# EAGLE board fasciaMainBoard_V0.1 (EAGLE 9.6.0)
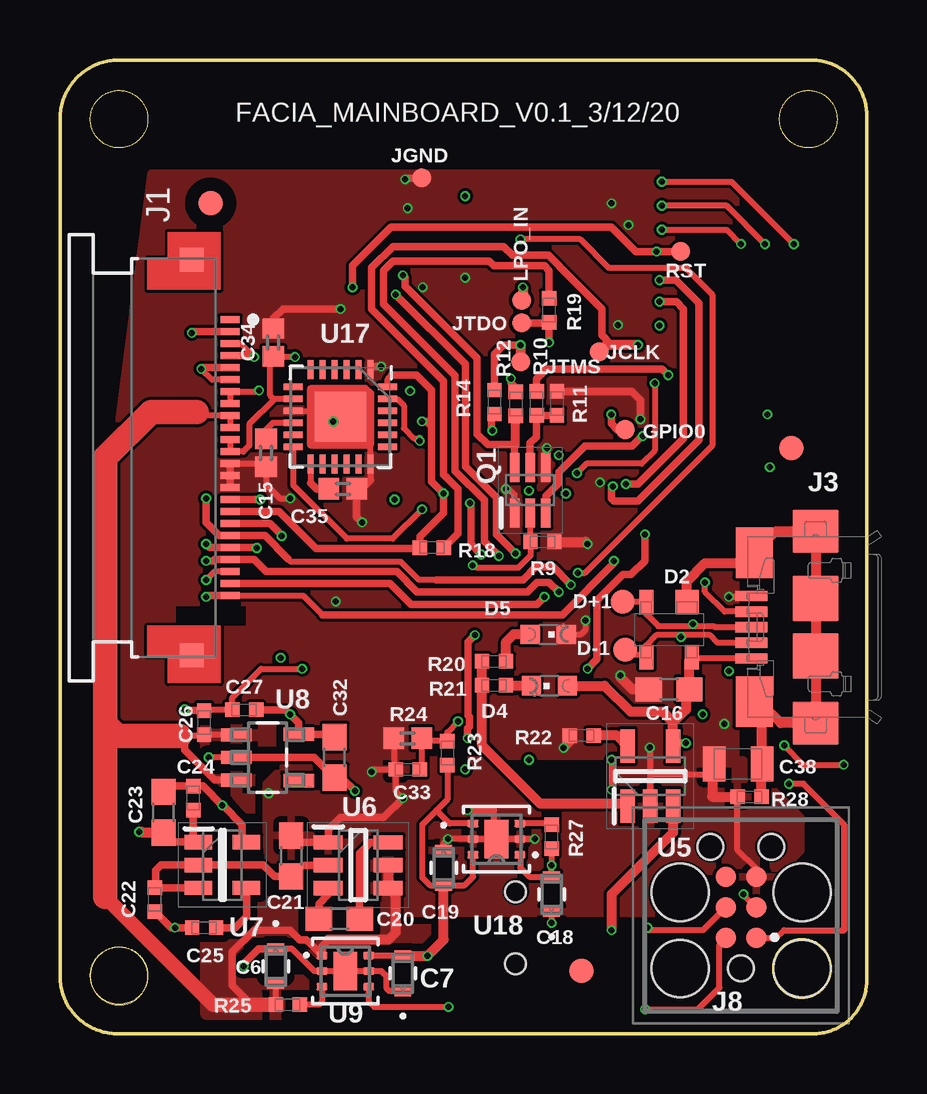
[diagram p0: board, top side]
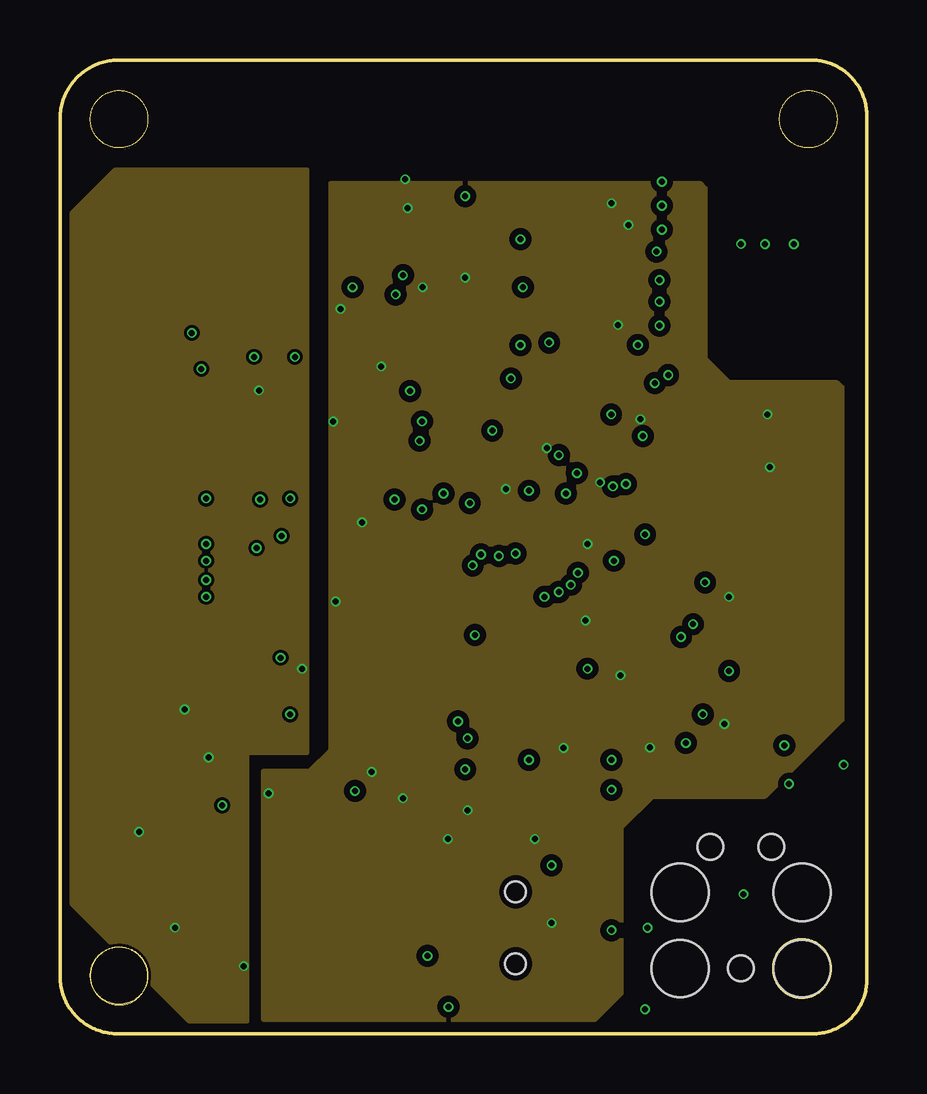
[diagram p1: board, inner layer Route2]
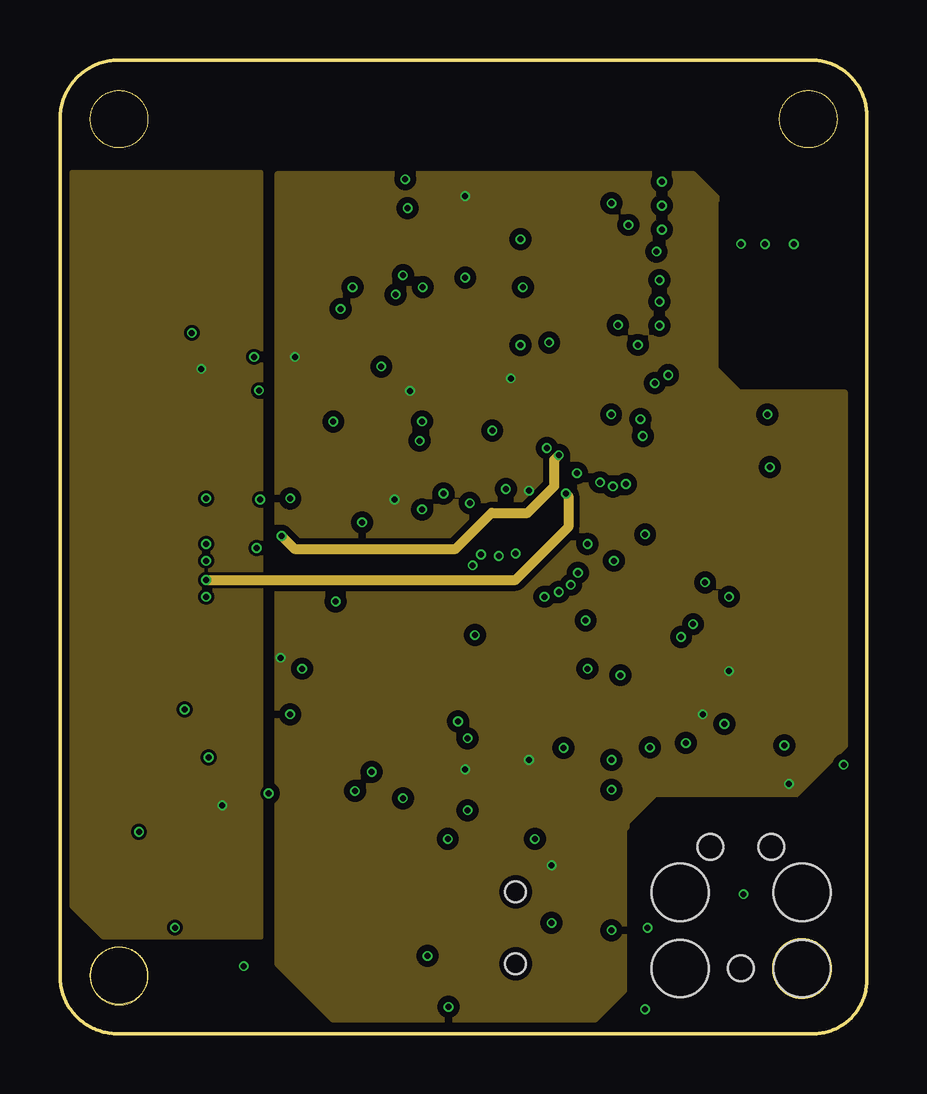
[diagram p2: board, inner layer Route15]
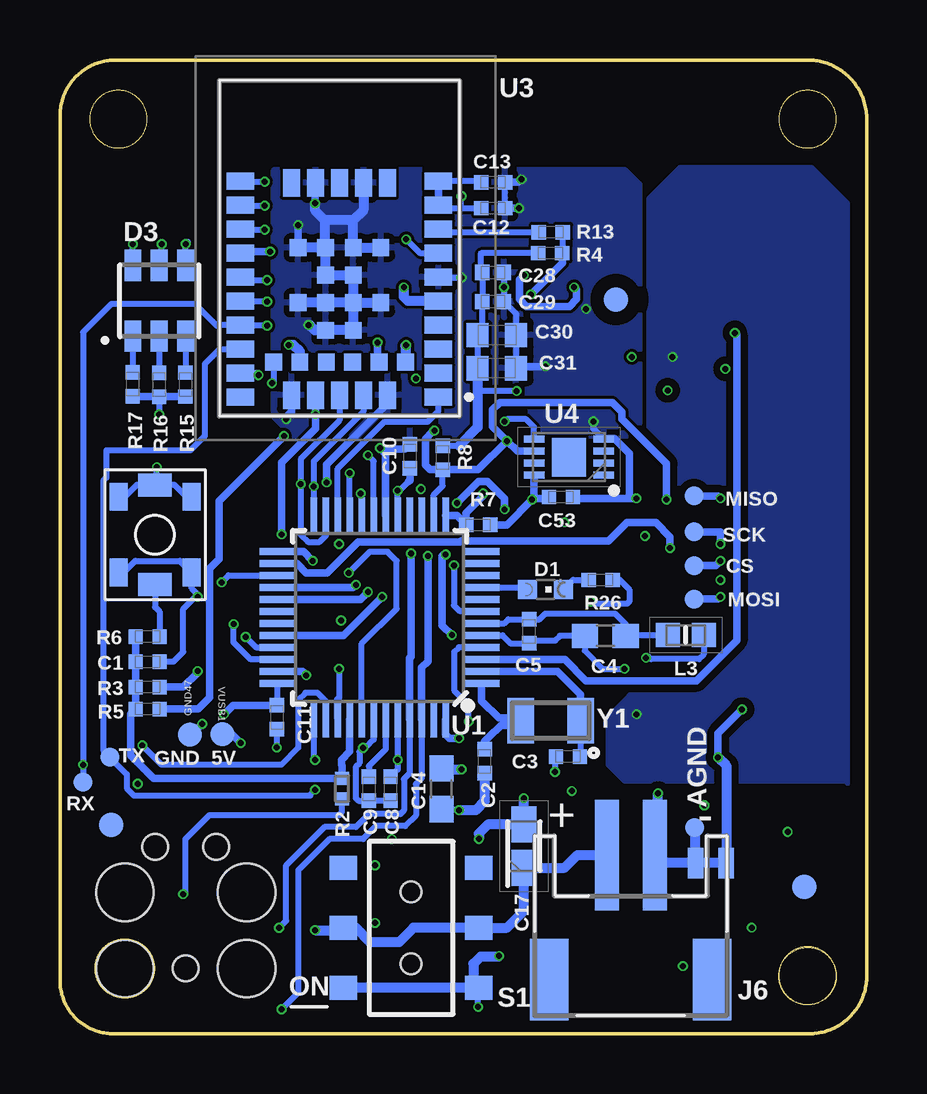
[diagram p3: board, bottom side, seen from below]

Size 33.63 x 40.59 mm. Coordinates in mm from the lower left corner, seen from the top.
Outline: 1093 segments
Copper layers ([15:(1*2)+15*16]): Top 0.035mm / dielectric 0.213359375mm / Route2 0.035mm / dielectric 1.0161mm / Route15 0.035mm / dielectric 0.213359375mm / Bottom 0.035mm
Design rules "SparkFun-4-layer-PCBWAY-LIMIT *": minimum track width 5mil, minimum drill 0.2mm, track to track 5mil, track to pad 5mil, pad to pad 5mil, via to via 5mil, smd to smd 0mil, copper to edge 5mil, drill to drill 5mil, minimum pad ring 3mil, minimum via ring 3mil, stop-mask expansion 4mil, vias tented up to drill 25mil, thermal gap 10mil
Net classes: 0 default: width 0.19 mm, drill 0.19 mm; 1 usb: width 0.19 mm, drill 0.19 mm, clearance 0.127 mm

## Footprints (pad centres in the part's own frame; a part is rotated, then mirrored left to right if it is on the bottom)
0402-TIGHT = smd 0.6 x 0.6: 1 -0.5,0; 2 0.5,0
0603 = smd 1.1 x 1: 1 -0.85,0; 2 0.85,0
CAP_CL10-L = smd 0.452 x 0.698: 1 -0.726,0; 2 0.726,0
0402 = smd 0.85 x 0.9: 1 -0.58,0; 2 0.58,0
CAPPM2014X120N = smd 1.5 x 1.05: 1 -0.9,0; 2 0.9,0
0402-1005X55N = smd 0.62 x 0.62: 1 -0.45,0; 2 0.45,0
0603-1608X90N = smd 0.95 x 1: 1 -0.8,0; 2 0.8,0
0805-R2013X50N = smd 0.95 x 1.45: 1 -1,0; 2 1,0
TP-0.8MM = smd 0.8 x 0.8 bottom: X 0,0
CHIPLED_0603 = smd 0.8 x 0.8: A 0,-0.75; C 0,0.75
SOT190P230X110-4N = smd 1 x 1: 1 -1.15,0.75 | smd 1 x 0.6: 2 -1.15,-0.95; 3 1.15,-0.95; 4 1.15,0.95
PLCC-6 = smd 1.3 x 0.7: A1 1.475,1.1; A2 1.475,0; A3 1.475,-1.1; C1 -1.475,1.1; C2 -1.475,0; C3 -1.475,-1.1
TP-1.00MM = smd 1 x 1 bottom: X 0,0
FD-1-1.5 = smd 1.016 x 1.016: P$1 0,0
MOLEX_52437-2471_0 = smd 0.3 x 0.8: 1 -5.75,0.8; 2 -5.25,0.8; 3 -4.75,0.8; 4 -4.25,0.8; 5 -3.75,0.8; 6 -3.25,0.8; 7 -2.75,0.8; 8 -2.25,0.8; 9 -1.75,0.8; 10 -1.25,0.8; 11 -0.75,0.8; 12 -0.25,0.8; 13 0.25,0.8; 14 0.75,0.8; 15 1.25,0.8; 16 1.75,0.8; 17 2.25,0.8; 18 2.75,0.8; 19 3.25,0.8; 20 3.75,0.8; 21 4.25,0.8; 22 4.75,0.8; 23 5.25,0.8; 24 5.75,0.8 | smd 1 x 1: MP1 -8.25,-0.8; MP2 8.25,-0.8
ZX62-AB-5PA = smd 0.4 x 1.35: 1 -1.3,3.025; 2 -0.65,3.025; 3 0,3.025; 4 0.65,3.025; 5 1.3,3.025 | smd 2.1 x 1.6: 6 3.1,2.9; 11 -3.1,2.9 | smd 1.8 x 1.9: 7 4,0.35; 10 -4,0.35 | smd 1.9 x 1.9: 8 1.2,0.35; 9 -1.2,0.35
JST-PH-2-SMT-RA = smd 1 x 4.6: 1 1,-3.7; 2 -1,-3.7 | smd 1.6 x 3.4: NC1 -3.4,1.5; NC2 3.4,1.5
TC2030MCP = smd 0.864 x 0.864: 1 -0.941,-0.635; 2 -0.941,0.635; 3 0.329,-0.635; 4 0.329,0.635; 5 1.599,-0.635; 6 1.599,0.635 | hole 1.067: -2.211,0; 2.869,1.27; 2.869,-1.27 | hole 2.383: -2.211,2.54; 0.964,2.54; -2.211,-2.54; 0.964,-2.54
BEADC1608X95N = smd 1 x 1: 1 -0.75,0; 2 0.75,0
C&K_PTS820_NO_HOLES = smd 1.15 x 0.75: 1 -1.575,1.525; 2 -1.575,-1.525; 3 1.575,1.525; 4 1.575,-1.525 | smd 0.95 x 1.4: 5 -2.075,0; 6 2.075,0
SOT65P210X110-6N = smd 1.2 x 0.4: 1 -0.95,0.65; 2 -0.95,0; 3 -0.95,-0.65; 4 0.95,-0.65; 5 0.95,0; 6 0.95,0.65
RESC1005X40N = smd 0.54 x 0.6: 1 -0.432,0; 2 0.432,0
SWITCH_DPDT_SMD_AYZ0202 = smd 1 x 1.15: 1 -2.5,2.825; 2 0,2.825; 3 2.5,2.825; 4 -2.5,-2.825; 5 0,-2.825; 6 2.5,-2.825 | hole 0.85: 1.5,0; -1.5,0
2PT_GND_TIE = smd 1.27 x 0.635: P$1 0,0.635; P$2 0,-0.635
TQFP-48 = smd 1.5 x 0.28: 1 -4.25,2.75; 2 -4.25,2.25; 3 -4.25,1.75; 4 -4.25,1.25; 5 -4.25,0.75; 6 -4.25,0.25; 7 -4.25,-0.25; 8 -4.25,-0.75; 9 -4.25,-1.25; 10 -4.25,-1.75; 11 -4.25,-2.25; 12 -4.25,-2.75; 25 4.25,-2.75; 26 4.25,-2.25; 27 4.25,-1.75; 28 4.25,-1.25; 29 4.25,-0.75; 30 4.25,-0.25; 31 4.25,0.25; 32 4.25,0.75; 33 4.25,1.25; 34 4.25,1.75; 35 4.25,2.25; 36 4.25,2.75 | smd 0.28 x 1.5: 13 -2.75,-4.25; 14 -2.25,-4.25; 15 -1.75,-4.25; 16 -1.25,-4.25; 17 -0.75,-4.25; 18 -0.25,-4.25; 19 0.25,-4.25; 20 0.75,-4.25; 21 1.25,-4.25; 22 1.75,-4.25; 23 2.25,-4.25; 24 2.75,-4.25; 37 2.75,4.25; 38 2.25,4.25; 39 1.75,4.25; 40 1.25,4.25; 41 0.75,4.25; 42 0.25,4.25; 43 -0.25,4.25; 44 -0.75,4.25; 45 -1.25,4.25; 46 -1.75,4.25; 47 -2.25,4.25; 48 -2.75,4.25
NINAW102 = smd 0.7 x 1.15: 1 -6.2,-3.875; 2 -5.2,-3.875; 3 -4.2,-3.875; 4 -3.2,-3.875; 5 -2.2,-3.875; 6 -1.2,-3.875; 7 -0.2,-3.875; 8 0.8,-3.875; 9 1.8,-3.875; 10 2.8,-3.875; 16 2.8,4.375; 17 1.8,4.375; 18 0.8,4.375; 19 -0.2,4.375; 20 -1.2,4.375; 21 -2.2,4.375; 22 -3.2,4.375; 23 -4.2,4.375; 24 -5.2,4.375; 25 -6.2,4.375 | smd 1.15 x 0.7: 11 2.725,-1.75; 12 2.725,-0.75; 13 2.725,0.25; 14 2.725,1.25; 15 2.725,2.25; 26 -6.125,2.25; 27 -6.125,1.25; 28 -6.125,0.25; 29 -6.125,-0.75; 30 -6.125,-1.75 | smd 0.7 x 0.7: 31 -4.75,-2.5; 32 -4.75,-1.4; 33 -4.75,-0.3; 34 -4.75,0.8; 35 -4.75,1.9; 36 -4.75,3; 37 -3.42,-0.325; 38 -3.42,0.825; 39 -2.27,-1.475; 40 -2.27,-0.325; 41 -2.27,0.825; 42 -2.27,1.975; 43 -1.12,-0.325; 44 -1.12,0.825; 45 0.03,-1.475; 46 0.03,-0.325; 47 0.03,0.825; 48 0.03,1.975
SON50P300X200X60-9N = smd 0.85 x 0.3: 1 -1.45,0.75; 2 -1.45,0.25; 3 -1.45,-0.25; 4 -1.45,-0.75; 5 1.45,-0.75; 6 1.45,-0.25; 7 1.45,0.25; 8 1.45,0.75 | smd 1.4 x 1.6: 9 0,0
SOT95P270X145-5N = smd 1.4 x 0.6: 1 -1.25,0.95; 2 -1.25,0; 3 -1.25,-0.95; 4 1.25,-0.95; 5 1.25,0.95
SOT95P280X145-6N = smd 1.2 x 0.6: 1 -1.25,0.95; 2 -1.25,0; 3 -1.25,-0.95; 4 1.25,-0.95; 5 1.25,0; 6 1.25,0.95
SOT96P230X110-5N = smd 1.15 x 0.6: 1 -1,0.955; 2 -1,0; 3 -1,-0.955; 4 1,-0.955; 5 1,0.955
SOT95P280X110-5N = smd 1.27 x 0.559: 1 -1.295,0.94; 2 -1.295,0; 3 -1.295,-0.94; 4 1.295,-0.965; 5 1.295,0.965
DRV0006A = smd 0.457 x 0.305: 1 -0.975,0.65; 2 -0.975,0; 3 -0.975,-0.65; 4 0.975,-0.65; 5 0.975,0; 6 0.975,0.65 | smd 0.991 x 1.6: 7 0,0
QFN50P400X400X95-25T265X275N = smd 0.26 x 0.79: 1 -1.25,-1.97; 2 -0.75,-1.97; 3 -0.25,-1.97; 4 0.25,-1.97; 5 0.75,-1.97; 6 1.25,-1.97; 13 1.25,1.97; 14 0.75,1.97; 15 0.25,1.97; 16 -0.25,1.97; 17 -0.75,1.97; 18 -1.25,1.97 | smd 0.79 x 0.26: 7 1.97,-1.25; 8 1.97,-0.75; 9 1.97,-0.25; 10 1.97,0.25; 11 1.97,0.75; 12 1.97,1.25; 19 -1.97,1.25; 20 -1.97,0.75; 21 -1.97,0.25; 22 -1.97,-0.25; 23 -1.97,-0.75; 24 -1.97,-1.25 | smd 2.15 x 2.05: 25 0,0
ECX-31B = smd 1.1 x 1.9: 1 -1.25,0; 2 1.25,0

## Placement (x,y rotation side)
C1  0.1uF  [0402-TIGHT]  29.98,15.51 0 bottom
C2  20pF  [0402-TIGHT]  15.93,11.35 90 bottom
C3  20pF  [0402-TIGHT]  12.46,11.55 0 bottom
C4  10uF  [0603]  10.9,16.58 0 bottom
C5  0.1uF  [0402-TIGHT]  14.07,16.77 90 bottom
C6  10uF  [CAP_CL10-L]  9,2.81 270 top
C7  10uF  [CAP_CL10-L]  14.29,2.52 90 top
C8  0.1uF  [0402-TIGHT]  19.85,10.21 90 bottom
C9  1uF  [0402-TIGHT]  20.75,10.21 90 bottom
C10  0.1uF  [0402-TIGHT]  19.04,24.08 270 bottom
C11  0.1uF  [0402-TIGHT]  24.58,13.19 90 bottom
C12  0.1uF  [0402-TIGHT]  15.57,34.41 0 bottom
C13  0.1uF  [0402-TIGHT]  15.57,35.49 180 bottom
C14  10uF  [0603]  17.73,10.21 90 bottom
C15  0.1uF  [0402]  8.6,24.21 270 top
C16  10uF  [0603]  25.39,14.35 0 top
C17  TAJR475K010RNJ  [CAPPM2014X120N]  14.29,7.82 90 bottom
C18  10uF  [CAP_CL10-L]  20.5,5.81 90 top
C19  10uF  [CAP_CL10-L]  16,6.91 270 top
C20  10uF  [0603]  11.65,4.79 180 top
C21  10uF  [0603]  9.64,7.41 270 top
C22  2.2uF  [0402-TIGHT]  3.95,5.59 90 top
C23  10uF  [0603]  4.32,9.23 90 top
C24  2.2uF  [0402-TIGHT]  5.56,9.82 90 top
C25  0.01uF  [0402-TIGHT]  6.01,4.42 0 top
C26  2.2uF  [0402-TIGHT]  6.01,12.97 270 top
C27  2.2uF  [0402-TIGHT]  7.68,13.5 0 top
C28  DNP  [0402-1005X55N]  15.57,31.73 180 bottom
C29  DNP  [0402-1005X55N]  15.57,30.52 0 bottom
C30  DNP  [0603-1608X90N]  15.42,29.12 180 bottom
C31  DNP  [0603-1608X90N]  15.42,27.74 0 bottom
C32  10uF  [0603]  11.45,11.52 90 top
C33  0.1uF  [0402-TIGHT]  14.5,11.02 0 top
C34  10NF0402-5%  [0402]  8.89,28.81 90 top
C35  0.1uF  [0402]  11.79,22.71 0 top
C38  4n7  [0805-R2013X50N]  28.27,11.25 180 top
C53  0.1uF  [0402-TIGHT]  12.75,22.37 0 bottom
CS  DNP  [TP-0.8MM]  7.2,19.52 0 top
D1  [CHIPLED_0603]  13.39,18.52 270 bottom
D2  PRTR5V  [SOT190P230X110-4N]  25.39,16.84 270 top
D3  LTRBGFSF-ABCB-QKYO-0-0-R18-Z  [PLCC-6]  29.49,30.55 90 bottom
D4  [CHIPLED_0603]  20.41,14.5 90 top
D5  [CHIPLED_0603]  20.36,16.65 270 top
D+1  DNP  [TP-1.00MM]  23.46,18.01 270 bottom
D-1  DNP  [TP-1.00MM]  23.56,16.01 270 bottom
FD1  DNP  [FD-1-1.5]  6.27,34.62 180 top
FD2  DNP  [FD-1-1.5]  21.74,2.63 180 top
FD3  DNP  [FD-1-1.5]  10.46,30.61 180 bottom
FD4  DNP  [FD-1-1.5]  30.5,24.41 0 top
FD5  DNP  [FD-1-1.5]  31.5,8.71 0 bottom
FD6  DNP  [FD-1-1.5]  2.59,6.11 0 bottom
GND47  DNP  [TP-1.00MM]  28.21,12.47 270 top
GPIO0  DNP  [TP-0.8MM]  23.57,25.19 90 bottom
J1  MOLEX_52437-2471MOLEX_52437-2471_0_0  [MOLEX_52437-2471_0]  6.29,24.02 270 top
J3  -  [ZX62-AB-5PA]  31.85,16.95 90 top
J6  [JST-PH-2-SMT-RA]  9.84,3.75 180 bottom
J8  TC2030-MCP  [TC2030MCP]  28.39,4.93 90 top
JCLK  DNP  [TP-0.8MM]  22.48,28.43 270 bottom
JGND  DNP  [TP-0.8MM]  15.09,35.67 270 bottom
JTDO  DNP  [TP-0.8MM]  19.24,29.63 270 bottom
JTMS  DNP  [TP-0.8MM]  19.21,28.01 270 bottom
L3  BLM18PG471SN1D  [BEADC1608X95N]  7.55,16.62 180 bottom
LPO_IN  DNP  [TP-0.8MM]  19.24,30.57 270 bottom
MISO  DNP  [TP-0.8MM]  7.2,22.41 0 top
MOSI  DNP  [TP-0.8MM]  7.2,18.12 0 top
PB1  PTS820  [C&K_PTS820_NO_HOLES]  29.67,20.8 270 bottom
PGND  DNP  [TP-0.8MM]  7.17,8.59 180 top
Q1  BSS138PS,115  [SOT65P210X110-6N]  19.6,22.66 90 top
R2  39R  [RESC1005X40N]  21.87,10.22 270 bottom
R3  10K  [0402-TIGHT]  29.98,14.45 0 bottom
R4  1k  [0402-TIGHT]  13.19,32.54 180 bottom
R5  330  [0402-TIGHT]  29.98,13.53 0 bottom
R6  330  [0402-TIGHT]  29.98,16.56 180 bottom
R7  4.7K  [0402-TIGHT]  16.19,21.21 0 bottom
R8  4.7K  [0402-TIGHT]  17.68,24.02 90 bottom
R9  150K  [0402-TIGHT]  20.11,20.5 180 top
R10  0  [0402-TIGHT]  19.87,26.28 270 top
R11  150K  [0402-TIGHT]  20.72,26.28 270 top
R12  10K  [0402-TIGHT]  19,26.25 270 top
R13  0  [0402-TIGHT]  13.17,33.41 180 bottom
R14  0  [0402-TIGHT]  18.11,26.33 270 top
R15  330  [0402-TIGHT]  28.4,27.06 270 bottom
R16  330  [0402-TIGHT]  29.5,27.05 270 bottom
R17  330  [0402-TIGHT]  30.6,27.07 270 bottom
R18  0  [0402-TIGHT]  15.5,20.26 180 top
R19  0  [0402-TIGHT]  20.39,30.16 270 top
R20  470  [0402-TIGHT]  18.09,15.53 180 top
R21  470  [0402-TIGHT]  18.09,14.52 180 top
R22  2K  [0402-TIGHT]  21.74,12.43 180 top
R23  374K  [0402-TIGHT]  16.15,11.7 270 top
R24  1.2M  [0402]  14.5,12.32 0 top
R25  10K  [0402-TIGHT]  9.5,1.21 0 top
R26  470  [0402-TIGHT]  11.1,18.91 180 bottom
R27  10K  [0402-TIGHT]  20.5,8.21 90 top
R28  1M  [0402-TIGHT]  28.75,9.88 0 top
RST  DNP  [TP-0.8MM]  25.87,32.61 180 bottom
RX  DNP  [TP-0.8MM]  31.56,11.52 180 top
S1  [SWITCH_DPDT_SMD_AYZ0202]  19,4.41 270 bottom
SCK  DNP  [TP-0.8MM]  7.2,20.91 0 top
SUPPLY1  2PT_GND_TIE  [2PT_GND_TIE]  6.5,7.11 270 bottom
TX  DNP  [TP-0.8MM]  32.67,10.49 180 top
U1  ATSAMD21G-A  [TQFP-48]  20.3,17.35 180 bottom
U3  NINA-W102  [NINAW102]  21.73,32.74 90 bottom
U4  ATECC508A-MAHDA-T  [SON50P300X200X60-9N]  12.41,24.04 180 bottom
U5  MCP73831T-4ADI_OT  [SOT95P270X145-5N]  24.61,10.73 90 top
U6  LM2664M6_NOPB  [SOT95P280X145-6N]  12.43,7.03 0 top
U7  TPS72325QDBVRQ1  [SOT96P230X110-5N]  6.77,7.03 0 top
U8  TLV70025DDCR  [SOT95P280X110-5N]  8.65,11.52 0 top
U9  LP5912Q3.3DRVRQ1  [DRV0006A]  11.89,2.61 0 top
U17  MPU6050  [QFN50P400X400X95-25T265X275N]  11.69,25.71 180 top
U18  LP5912Q3.3DRVRQ1  [DRV0006A]  18.19,8.11 180 top
VUSB1  DNP  [TP-1.00MM]  26.86,12.48 270 top
Y1  32.768Khz  [ECX-31B]  13.18,13.05 180 bottom

## Library data of the parts
C1-C3 C5 C8-C13 C22 C24-C27 C33 C53 = novaXR; PROD_ID: CAP-12416
C4 C14 C16 C20 C21 C23 C32 = SparkFun-Capacitors; PROD_ID: CAP-11015
C6 C7 C18 C19 = Lp5912Q3.3DRV; MANUFACTURER_PART_NUMBER: CL10B106MQ8NRNC; VENDOR: Samsung
C15 C35 = SparkFun-Capacitors; PROD_ID: CAP-12416
C17 = SamacSys_Parts; ALLIED_NUMBER: 70475142; ALLIED_PRICE-STOCK: https://www.alliedelec.com/avx-tajr475k010rnj/70475142/; DESCRIPTION: AVX 4.7uF SMD Solid MnO2 Tantalum Electrolytic Capacitor, 10 V dc +/-10%, TAJ Series; HEIGHT: 1.2mm; MANUFACTURER_NAME: AVX; MANUFACTURER_PART_NUMBER: TAJR475K010RNJ; MOUSER_PART_NUMBER: 581-TAJR475K010R; MOUSER_PRICE-STOCK: https://www.mouser.com/Search/Refine.aspx?Keyword=581-TAJR475K010R; RS_PART_NUMBER: 1355409P; RS_PRICE-STOCK: http://uk.rs-online.com/web/p/products/1355409P
C28-C31 = Arduino-rcl; CODE-ARDUINO: DNP; DATASHEET: DNP; DISTRIBUTOR-LINK: DNP; DISTRIBUTOR-PN: DNP; MANUFACTURER: DNP; MANUFACTURER-PN: DNP
C34 = SparkFun-Capacitors
C38 = Arduino-rcl; CODE-ARDUINO: 0689; DATASHEET: http://www.kemet.com/Lists/ProductCatalog/Attachments/40/KEM_C1010_X7R_HV_SMD.pdf; DISTRIBUTOR-LINK: www.kemet.com/docfinder?Partnumber=C0805C472KDRACTU; DISTRIBUTOR-PN: 399-6738-1-ND; MANUFACTURER: Kemet; MANUFACTURER-PN: C0805C472KDRACTU; VOLTAGE: 1KV
CS D+1 D-1 FD1-FD6 GND47 GPIO0 JCLK JGND JTDO JTMS LPO_IN MISO MOSI PGND RST RX SCK TX VUSB1 = Arduino-utility; CODE-ARDUINO: DNP; DATASHEET: DNP; DISTRIBUTOR-LINK: DNP; DISTRIBUTOR-PN: DNP; MANUFACTURER: DNP; MANUFACTURER-PN: DNP
D1 D4 D5 J6 = adafruit
D2 = Arduino-diodes; CODE-ARDUINO: 2209; DATASHEET: http://www.nxp.com/documents/data_sheet/PRTR5V0U2X.pdf; DISTRIBUTOR-LINK: http://www.digikey.com/product-detail/en/nxp-semiconductors/PRTR5V0U2X,215/568-4140-1-ND/1589981; DISTRIBUTOR-PN: 568-4140-1-ND; MANUFACTURER: NXP; MANUFACTURER-PN: PRTR5V0U2X,215
D3 = SamacSys_Parts; DESCRIPTION: LED RGB DIFFUSED 6SMD; HEIGHT: mm; MANUFACTURER_NAME: OSRAM Opto Semiconductors; MANUFACTURER_PART_NUMBER: LTRBGFSF-ABCB-QKYO-0-0-R18-Z; MOUSER_PART_NUMBER: N/A; MOUSER_PRICE-STOCK: https://www.mouser.com/Search/Refine.aspx?Keyword=N%2FA
J1 = Molex - 52437-2471; CIIVA_IDS: 605212; CIRCUITS_LOADED: 24; COMPONENT_LINK_1_DESCRIPTION: Manufacturer URL; COMPONENT_LINK_1_URL: http://www.molex.com/molex/index.jsp; COMPONENT_LINK_3_DESCRIPTION: Package Specification; COMPONENT_LINK_3_URL: http://www.molex.com/pdm_docs/sd/524372471_sd.pdf; CONTACT_POSITION: Bottom; CURRENT_MAX_PER_CONTACT: 0.5A; DATASHEET: http://www.molex.com/webdocs/datasheets/pdf/en-us/0524372471_FFC_FPC_CONNECTORS.pdf; DURABILITY_MATING_CYCLES_MAX: 20; ENTRY_ANGLE: 90degrees Angle; FOOTPRINT_VARIANT_NAME_0: Manufacturer Recommended; IMPORTED: yes; IMPORTED_FROM: vault; IMPORT_TS: 1521869192; MATERIAL___METAL: Phosphor Bronze; MATERIAL___PLATING_MATING: Gold; MATERIAL___PLATING_TERMINATION: Gold; MF: Molex; MOUNTING_TECHNOLOGY: Surface Mount; MPN: 52437-2471; NUMBER_OF_ROWS: 1; ORIENTATION: Right Angle; PACKAGE: 52437-2471; PACKAGE_DESCRIPTION: 24-Lead FPC Connector, Pitch 0.5 mm; PACKAGE_VERSION: Rev. E, 07/2013; PACKING: Tape and Reel; PCB_LOCATOR: No; PCB_RETENTION: None; PITCH___MATING_INTERFACE: 0.50mm; POLARIZED_TO_PCB: Yes; PREFIX: J; RELEASE_DATE: 1411372502; ROHS: Yes; STACKABLE: No; VAULT_GUID: C435F480-C5D6-47A9-8B3E-1F527B5FE02A; VAULT_REVISION: D1E34D73-9D44-46B4-956C-D39459EFC8BE; VOLTAGE_MAX: 50V
J3 = Arduino-connectors; CODE-ARDUINO: 2219; DATASHEET: https://www.hirose.com/product/en/download_file/key_name/ZX/category/Catalog/doc_file_id/31704/?file_category_id=4&item_id=13&is_series=1; DISTRIBUTOR-LINK: http://www.digikey.com/product-detail/en/hirose-electric-co-ltd/ZX62-AB-5PA(31)/H125279CT-ND/5994741; DISTRIBUTOR-PN: H125279CT-ND; MANUFACTURER: Hirose; MANUFACTURER-PN: ZX62-AB-5PA(31)
J8 = TC2030-MCP; ALLIED_NUMBER: 70547380; ALLIED_PRICE-STOCK: https://www.alliedelec.com/microchip-technology-inc-tc2030-mcp/70547380/; DESCRIPTION: TC2030-MCP PCB FOOTPRINT,TC2030-MCP; HEIGHT: 3mm; MANUFACTURER_NAME: Microchip; MANUFACTURER_PART_NUMBER: TC2030-MCP; MOUSER_PART_NUMBER: 579-TC2030-MCP; MOUSER_PRICE-STOCK: https://www.mouser.com/Search/Refine.aspx?Keyword=579-TC2030-MCP; RS_PART_NUMBER: 8252568; RS_PRICE-STOCK: http://uk.rs-online.com/web/p/products/8252568
L3 = SamacSys_Parts; DESCRIPTION: Chip Ferrite Bead; HEIGHT: 0.95mm; MANUFACTURER_NAME: Murata Electronics; MANUFACTURER_PART_NUMBER: BLM18PG471SN1D; MOUSER_PART_NUMBER: 81-BLM18PG471SN1D; MOUSER_PRICE-STOCK: https://www.mouser.com/Search/Refine.aspx?Keyword=81-BLM18PG471SN1D; RS_PART_NUMBER: 7241425P; RS_PRICE-STOCK: http://uk.rs-online.com/web/p/products/7241425P
PB1 = Arduino-pushbuttons; CODE-ARDUINO: 0277; DATASHEET: http://www.ckswitches.com/media/1474/pts820.pdf; DISTRIBUTOR-LINK: https://www.digikey.com/product-detail/en/c-k/PTS820-J15M-SMTR-LFS/CKN10506CT-ND/4176681; DISTRIBUTOR-PN: PTS820 J25K SMTR LFS-ND; MANUFACTURER: C&K; MANUFACTURER-PN: PTS820 J25K SMTR LFS
Q1 = SamacSys_Parts; DESCRIPTION: Nexperia BSS138PS,115 Dual N-channel MOSFET, 320 mA, 60 V, 6-Pin SOT-363; HEIGHT: 1.1mm; MANUFACTURER_NAME: Nexperia; MANUFACTURER_PART_NUMBER: BSS138PS,115; MOUSER_PART_NUMBER: 771-BSS138PS115; MOUSER_PRICE-STOCK: https://www.mouser.com/Search/Refine.aspx?Keyword=771-BSS138PS115; RS_PART_NUMBER: 7920901P; RS_PRICE-STOCK: http://uk.rs-online.com/web/p/products/7920901P
R2 = RC0402FR-0739RL; AVAILABILITY: Unavailable; DESCRIPTION: Surface Mount Thick Film Resistor, RC Series, 39 ohm, 63 mW, - 1%, 50 V, 0402 [1005 Metric]; MF: Yageo; MP: RC0402FR-0739RL; PACKAGE: 1005 Panasonic Electronic Components; PRICE: None
R3-R28 = novaXR
S1 = SparkFun-Switches; PROD_ID: SWCH-08179; SF_SKU: COM-00597
SUPPLY1 = SparkFun-PowerSymbols
U1 = SparkFun-IC-Microcontroller; PROD_ID: IC-13064
U3 = SamacSys_Parts; DESCRIPTION: STAND-ALONE MULTIRADIO MODULE; HEIGHT: 3mm; MANUFACTURER_NAME: U-Blox; MANUFACTURER_PART_NUMBER: NINA-W102
U4 = SamacSys_Parts; DESCRIPTION: Microchip ATECC508A-MAHDA-T 10kb 8-Pin Crypto Authentication IC UDFN; HEIGHT: 0.6mm; MANUFACTURER_NAME: Microchip; MANUFACTURER_PART_NUMBER: ATECC508A-MAHDA-T; MOUSER_PART_NUMBER: 556-ATECC508A-MAHDAT; MOUSER_PRICE-STOCK: https://www.mouser.com/Search/Refine.aspx?Keyword=556-ATECC508A-MAHDAT; RS_PART_NUMBER: 1773144P; RS_PRICE-STOCK: http://uk.rs-online.com/web/p/products/1773144P
U5 = SamacSys_Parts; ALLIED_NUMBER: 70567395; ALLIED_PRICE-STOCK: https://www.alliedelec.com/microchiptechnologyinc-mcp73831t-4adi-ot/70567395/; DESCRIPTION: Battery Management Li-Ion/Li-Poly Charg Mgnt 4.4V Vreg out; HEIGHT: 1.45mm; MANUFACTURER_NAME: Microchip; MANUFACTURER_PART_NUMBER: MCP73831T-4ADI/OT; MOUSER_PART_NUMBER: 579-MCP73831T4ADIOT; MOUSER_PRICE-STOCK: https://www.mouser.com/Search/Refine.aspx?Keyword=579-MCP73831T4ADIOT
U6 = SamacSys_Parts; DESCRIPTION: 1.8V to 5.5Vin Switched Capacitor Voltage Converter; HEIGHT: 1.45mm; MANUFACTURER_NAME: Texas Instruments; MANUFACTURER_PART_NUMBER: LM2664M6/NOPB; MOUSER_PART_NUMBER: 926-LM2664M6/NOPB; MOUSER_PRICE-STOCK: https://www.mouser.com/Search/Refine.aspx?Keyword=926-LM2664M6%2FNOPB; RS_PART_NUMBER: 5358792P; RS_PRICE-STOCK: http://uk.rs-online.com/web/p/products/5358792P
U7 = SamacSys_Parts; DESCRIPTION: Automotive Single Output LDO, 200mA, High PSRR, Low Noise; HEIGHT: 1.1mm; MANUFACTURER_NAME: Texas Instruments; MANUFACTURER_PART_NUMBER: TPS72325QDBVRQ1
U8 = SamacSys_Parts; DESCRIPTION: 200-mA, Low-IQ, Low-Dropout Regulator for Portable Devices; HEIGHT: mm; MANUFACTURER_NAME: Texas Instruments; MANUFACTURER_PART_NUMBER: TLV70025DDCR; MOUSER_PART_NUMBER: 595-TLV70025DDCR; MOUSER_PRICE-STOCK: https://www.mouser.com/Search/Refine.aspx?Keyword=595-TLV70025DDCR
U9 U18 = Lp5912Q3.3DRV
U17 = invensense
Y1 = SamacSys_Parts; DESCRIPTION: Crystals 32.768KHz 20ppm 12.5pF -40C +85C; HEIGHT: mm; MANUFACTURER_NAME: ECS; MANUFACTURER_PART_NUMBER: ECS-.327-12.5-34B-TR; MOUSER_PART_NUMBER: 520-327-12.5-34B; MOUSER_PRICE-STOCK: https://www.mouser.com/Search/Refine.aspx?Keyword=520-327-12.5-34B

## Nets
+5V: C16.2 D2.4 D4.A J3.1 U5.4 VUSB1.X
-RAW: C21.2 C22.2 U6.2 U7.2 U7.3
_V_BATT: C17.1 J6.1 S1.2 S1.5 U5.3
ADS_RESET: J1.23 U1.32
AGND: C4.1 C5.1 C6.1 C7.1 C22.1 C23.1 C24.1 C25.1 C26.1 C27.1 C32.1 J1.7 J1.8 SUPPLY1.P$1 U1.5 U7.1 U8.2 U9.2 U9.5 U9.7
AVDD: C27.2 C32.2 J1.3 J1.4 U8.5
AVSS: C23.2 C24.2 J1.5 J1.6 U7.5
BLUE: D3.A3 U3.18
DVDD: C6.2 C26.2 J1.9 J1.10 R25.1 U6.4 U6.5 U8.1 U8.3 U9.1
DVDD_ISO: U1.11
GND: C1.2 C2.1 C3.1 C8.1 C9.1 C10.1 C11.1 C12.2 C13.1 C14.1 C15.2 C16.1 C17.2 C18.1 C19.1 C21.1 C28.1 C29.2 C30.1 C31.2 C33.1 C34.2 C35.2 C38.2 C53.2 D5.C GND47.X J1.13 J1.14 J1.15 J3.5 J6.2 J8.5 JGND.X PB1.1 PB1.2 PB1.3 PB1.4 PB1.5 PGND.X Q1.1 Q1.4 R9.1 R11.1 R15.2 R16.2 R17.2 R22.2 R24.1 R26.1 R28.1 SUPPLY1.P$2 U1.18 U1.35 U1.42 U3.6 U3.12 U3.14 U3.26 U3.30 U3.37 U3.38 U3.39 U3.40 U3.41 U3.42 U3.43 U3.44 U3.45 U3.46 U3.47 U3.48 U4.4 U5.2 U6.1 U17.1 U17.9 U17.18 U17.25 U18.2 U18.5 U18.7
GND_ISO: U1.8
GREEN: D3.A1 U3.16
MPU_INT: U1.48 U17.12
N$1: J8.3 R2.2
N$2: R27.2 U18.3
N$3: PB1.6 R6.1
N$4: C2.2 U1.1 Y1.2
N$5: C15.1 U17.10
N$6: C3.2 U1.2 Y1.1
N$7: R25.2 U9.3
N$8: Q1.5 R10.2 R11.2
N$9: R10.1 U3.24
N$10: C9.2 U1.43
N$11: R13.2 U3.8
N$12: Q1.6 R12.2 RST.X U3.19
N$13: D1.C R26.2
N$14: C35.1 U17.13
N$15: D1.A U1.9
N$16: D3.C1 R17.1
N$17: D3.C2 R16.1
N$18: D3.C3 R15.1
N$19: JTMS.X R14.1 U3.31
N$20: JTDO.X R19.2 U3.32
N$21: JCLK.X R18.1 U3.35
N$23: LPO_IN.X U3.5
N$25: D4.C R21.1
N$28: R20.2 R21.2 U5.1
N$30: R22.1 U5.5
N$31: C20.2 U6.3
N$32: C20.1 U6.6
N$33: C25.2 U7.4
N$40: C38.1 D2.1 J3.6 J3.7 J3.8 J3.9 J3.10 J3.11 R28.2
N$42: D5.A R20.1
PA02_EDA_SIG: J1.2 U1.3
PA10_D2: U1.15
PA12_S2_TX_MOSI: U1.21 U3.36
PA13_S2_RX_MISO: U1.22 U3.1
PA14_S2_RTS_CS: U1.23 U3.21 U3.28
PA15_S2_CTS_SCK: U1.24 U3.20 U3.29
PA16_S1_MOSI: J1.24 MOSI.X U1.25
PA17_S1_SCK: J1.20 SCK.X U1.26
PA18_OTG: J3.4 U1.27
PA19_S1_MISO: J1.19 MISO.X U1.28
PA20_CS: CS.X J1.21 U1.29
PA21_CS1: U1.30
PA27_GPIO0: GPIO0.X U1.39 U3.27
PA28_ACK: U1.41 U3.7
PA30_SWCLK: J8.4 R4.1 R13.1 U1.45
PA31_SWDIO: J8.2 R19.1 U1.46
PB08_RST: Q1.2 R9.2 U1.7
PB10_DRDY: J1.18 U1.19
PB11_CLKSEL: J1.22 U1.20
PB22_S5_TX: RX.X U1.37 U3.23
PB23_S5_RX: TX.X U1.38 U3.22
RED: D3.A2 U3.17
RESET#: Q1.3 R5.2
RESETN: C1.1 R2.1 R3.1 R5.1 R6.2 U1.40
S0_I2C_SCL: J1.16 R8.1 R14.2 U1.14 U4.6 U17.23
S0_I2C_SDA: J1.17 R7.1 R18.2 U1.13 U4.5 U17.24
USBN: D2.3 D-1.X J3.2 U1.33
USBP: D2.2 D+1.X J3.3 U1.34
V_BATT: C7.2 C19.2 R23.2 S1.3 S1.6 U9.4 U9.6 U18.4 U18.6
VBAT_LVL: C33.2 R23.1 R24.2 U1.4
VCC: C8.2 C10.2 C11.2 C12.1 C13.2 C14.2 C18.2 C28.2 C29.1 C30.2 C31.1 C34.1 C53.1 J1.11 J1.12 J8.1 L3.1 R3.2 R4.2 R7.2 R8.2 R12.1 R27.1 U1.17 U1.36 U1.44 U3.9 U3.10 U4.8 U17.8 U18.1
VDDANA: C4.2 C5.2 L3.2 U1.6

## Tracks (layer width: path | path; a pad name or v marks a point on that pad's centre or on a via)
+5V  (via drill 0.25)
  Top 0.254: J3.1 26.29,15.65 26.24,15.59
  Top 0.305: U5.4 25.69,12.11 v26.1,12.11
  Top 0.406: D4.A 22.71,14.5 23.79,13.41 25.13,13.41 25.56,12.98 | D2.4 26.24,15.59 C16.2 26.1,14.21 26.1,13.52 25.56,12.98 | U5.4 25.56,12.98
  Bottom 0.305: v26.1,12.11 26.46,12.48 VUSB1.X
-RAW
  Top 0.305: 3.97,6.08 C22.2 4,6.13 | 4,6.13 4,6.81 4.21,7.03 U7.2 8.48,7.03 8.95,6.56 C21.2 10.11,7.03 U6.2 | U7.3 4.05,6.08 4,6.13
_V_BATT  (via drill 0.25)
  Top 0.406: U5.3 25.56,8.38 23,5.81 v23,4.31
  Bottom 0.406: J6.1 12.06,7.45 12.59,6.92 C17.1 14.29,5.12 15,4.41 S1.2 18.89,4.41 19.5,3.81 20.69,3.81 21.29,4.41 S1.5 21.92,4.31 v23,4.31
ADS_RESET  (via drill 0.25)
  Top 0.305: J1.23 13.76,18.77 14.63,17.9 19.88,17.9 v20.19,18.21
  Bottom 0.305: U1.32 21.81,16.6 v20.19,18.21
AGND  (via drill 0.25)
  Top 0.254: J1.8 J1.7 8.29,26.77 v8.29,26.81 | C26.1 6.04,13.5 C27.1 7.18,14 8.39,15.21 v10.1,15.21 | U8.2 6.4,11.52 6.39,11.52 v6.2,11.52 | C7.1 13.72,1.79 13.6,1.91 13.6,2.41 13.39,2.61 U9.5 U9.7 U9.2 10.6,2.61 9.67,3.54 C6.1
  Top 0.305: v12.29,10.11 11.74,10.67 C32.1 10.6,11.52 U8.2 | C25.1 v4.79,4.42 4.63,4.42 C22.1 | U7.1 5.7,7.99 | 5.7,7.99 4.71,7.99 C23.1 | C24.1 5.56,8.12 5.7,7.99 | C6.1 8.29,3.54 7.66,2.91 v7.66,2.81 | C26.1 5.24,13.47 v5.2,13.52
  Top 0.406: C23.1 3.43,8.38 3.39,8.41 v3.29,8.41
  Bottom 0.254: U1.5 15.18,16.6 14.86,16.27 C5.1 13.96,16.38 13,16.38 12.79,16.58 C4.1 11.75,15.97 11,15.21 v10.1,15.21
  Bottom 0.305: v5.2,13.52 6.2,12.52 v6.2,11.52
  Bottom 0.406: v6.2,11.52 5.86,11.18 SUPPLY1.P$1
  pour Route2: 10.29,36.02 10.29,11.71 7.79,11.71 7.79,0.51 5.39,0.51 0.5,5.41 0.5,34.21 2.29,36.02
AVDD  (via drill 0.25)
  Top 0.254: J1.3 7.54,28.77 v8.09,28.21
  Top 0.305: J1.4 8.04,28.27 v8.09,28.21 | C32.2 11.33,12.48 U8.5 9.95,12.96 v9.6,13.31 9.41,13.5 C27.2
  pour Bottom (isolate 0.305): 2.29,36.12 7.79,36.12 9.1,34.81 9.1,14.91 10.79,13.21 10.79,11.21 10.1,10.52 0.89,10.52 0.79,10.41 0.79,34.62
AVSS  (via drill 0.25)
  Top 0.254: J1.6 6.34,27.27 v5.89,27.71
  Top 0.305: C23.2 4.56,10.32 C24.2 5.96,10.32 v6.77,9.52 6.79,9.52 7.59,8.71 7.59,8.17 U7.5 | J1.5 5.95,27.77 v5.89,27.71
  pour Route15: 8.39,4.02 8.39,35.91 0.5,35.91 0.5,5.31 1.79,4.02
BLUE  (via drill 0.25)
  Top 0.254: v25.1,33.52 27.79,33.52 v28.39,32.92
  Bottom 0.254: U3.18 26.08,33.52 v25.1,33.52 | D3.A3 v28.39,32.92 | v28.39,32.92 28.29,33.02 v28.39,32.92
DVDD
  Top 0.254: J1.10 J1.9 5.84,25.77 5.7,25.91 | U8.1 6.03,12.46 C26.2 5.95,12.41 5.2,12.41 5,12.41 | C6.2 R25.1
  Top 0.305: 11.19,3.91 10.92,3.64 U9.1 10.48,3.7 10.27,3.91 10,3.91 9.6,4.31 8.09,4.31 7.18,3.4 7.18,2.02 8,1.21 R25.1 | U8.3 6.45,10.58 5.2,11.84 5.2,12.41
  Top 0.406: U6.5 U6.4 14,5.77 14,4.21 13.69,3.91 11.19,3.91
  Top 0.61: R25.1 6.39,1.21 1.89,5.71
  Top 1.016: 5.7,25.91 3.79,25.91 1.89,24.02 1.89,15.02 1.89,12.91 | 1.89,12.91 2.39,12.41 5,12.41 | 1.89,5.71 1.89,12.91
  pour Top (isolate 0.305, rank 2): 23.19,0.81 6.09,0.81 6.09,13.81 23.19,13.81
GND  (via drill 0.25)
  Top 0.254: C18.1 v20.5,4.61 | v19.79,8.11 U18.2 U18.7 | C19.1 16,7.94 v16.17,8.11 U18.5 U18.7 | J3.5 28.8,18.21 v27.89,18.21 | J8.5 29.03,6.88 28.25,7.66 R28.1 | Q1.1 18.95,22.46 18.69,22.71 v18.6,22.71 v18.59,22.71 | v13,10.91 13.1,11.02 C33.1 | R24.1 13.92,11.1 C33.1 | C33.1 14,10.11 v14.29,9.81 | U5.2 24.6,9.5 v24.6,11.93 24.6,10.81 27.19,10.81 | U18.7 18.1,8.21 18.1,9.31 v17,9.31 | v21.91,17.23 21.91,16.84 21.72,16.65 D5.C | 12.94,23.09 U17.18 12.94,24.46 11.89,25.52 11.5,25.52 | U17.1 13.07,27.81 | C34.2 8.89,29.81 | C15.2 8.6,23.46 | J1.13 8.46,23.77 C15.2 | C15.2 8.6,22.89 9.17,22.31 v9.6,22.31 | U17.25 11.5,25.52 | 11.5,25.52 v11.39,25.52 10.94,25.96 U17.9
  Top 0.305: Q1.4 20.25,24.37 v20.29,24.41 | C21.1 9.92,7.98 U6.1 11.19,7.99 11.19,8.52 11.69,9.02 13.5,9.02 v14.29,9.81 | R11.1 23.83,26.78 24.19,26.41 v24.19,25.62 | J1.13 J1.14 J1.15 | v14.39,35.62 14.45,35.67 JGND.X | v23.36,14.95 v23.37,14.94 | 12.94,23.09 12.57,22.71 C35.2 12.37,21.53 v12.6,21.31 | 13.07,27.81 v13.39,27.81 | 8.89,29.81 9.29,30.21 v11.69,30.21
  Top 0.406: C38.2 27.19,11.18 27.19,10.81 27.19,9.88 R28.1 | C16.1 23.86,14.35 23.37,14.84 v23.37,14.94 | R22.2 21.24,12.16 v21,11.91 | R9.1 21.91,20.5 v22,20.41
  Bottom 0.19: SUPPLY1.P$2 7.13,7.65
  Bottom 0.254: PB1.3 28.14,18.56 27.89,18.31 v27.89,18.21 28,18.21 28.5,17.71 28.5,15.91 28.89,15.52 C1.2 | PB1.3 | C28.1 v15.12,31.12 C29.2 14.62,30.02 C30.1 C31.2 | U3.6 17.83,31.52 v16.89,31.52 | C12.2 C13.1 | C8.1 C9.1 21.19,9.71 21.31,9.83 21.31,11.11 21.15,11.27 21.15,11.76 v21,11.91 20.89,11.91 20.55,12.26 U1.42 | C3.1 13,11.51 v13,10.91 | C11.1 24.6,12.68 v24.6,11.93 | C14.1 17.04,9.36 v17,9.31 | R26.1 10.29,18.91 9.89,18.52 9.89,18.02 10,17.91 11.5,17.91 v11.5,18.02 | R16.2 v29.5,25.82 v29.5,25.81 | PB1.1 28.36,22.38 28.86,22.88 PB1.5 | PB1.5 30.43,22.88 30.93,22.38 PB1.2 | PB1.5 29.6,22.95 v29.6,23.62 | PB1.4 30.98,19.23 30.5,19.71 28.64,19.71 PB1.3 | U4.4 11.39,25.22 v11.39,25.52
  Bottom 0.305: R15.2 R16.2 30.58,26.55 R17.2 | U1.18 20.05,24.17 v20.29,24.41 20.26,24.38 19.24,24.38 C10.1 | U3.26 23.98,25.93 24.19,25.71 v24.19,25.62 | U3.48 v23.71,33.7 v23.69,33.71 | U3.14 23,35.45 v23,34.62 | GND47.X 28.14,12.47 v27.69,12.91 | U1.35 23.52,15.1 v23.36,14.95 | U4.4 10.93,24.81 10.52,24.81 9.89,24.19 9.89,22.31 v9.6,22.31 12.19,22.31 C53.2 | U3.30 20,26.6 20,26.24 22.51,23.72 v22.51,22.98 | C12.2 v14.5,34.41 | v15.12,31.12 | C13.1 14.52,35.49 v14.39,35.62 | v13.39,27.81 14.55,27.81 C31.2
  Bottom 0.406: SUPPLY1.P$2 8.5,7.11 J6.2 8.84,9.17 8.69,9.31 v8.69,10.02 | v14.29,9.81 C17.2 15.79,8.72 16.17,8.34 v16.17,8.11 | C2.1 15.93,9.68 16.29,9.31 v17,9.31 | PGND.X 7.17,7.68 7.13,7.65 | U3.12 20.98,34.33 21.41,33.9 | 21.41,33.9 U3.46 U3.45 | 21.41,33.9 21.42,33.91 22.6,33.91 | 22.6,33.91 23,34.31 v23,34.62 | 22.6,33.91 22.6,32.81 U3.47 | U3.47 U3.48 | U3.40 U3.43 U3.44 U3.47 | U3.40 U3.41 U3.42 | U3.40 U3.39 | U3.40 U3.37 U3.38 23,29.32 23.22,29.54 v23.27,29.54
  pour Route2 (isolate 0.254): 32.39,27.12 27.89,27.12 26.89,28.12 26.89,35.21 26.69,35.41 11.29,35.41 11.29,11.81 10.39,10.91 8.5,10.91 8.5,0.61 22.29,0.61 23.39,1.71 23.39,8.61 24.69,9.91 29.39,9.91 32.59,13.11 32.59,26.91
  pour Top: 8.69,7.41 8.69,6.21 9.89,5.02 28.29,5.02 30.89,7.61 30.89,9.02 28.5,11.41 9.6,11.41 8.6,10.41 8.6,7.61 8.69,7.52
  pour Top (no thermals): 28.19,35.91 28.19,11.52 3,11.52 0.89,13.61 3.79,35.91
  pour Bottom: 24.69,36.02 10.1,36.02 9.5,35.41 9.5,25.41 10,24.91 23.69,24.91 23.79,24.81 24.69,25.71
GREEN  (via drill 0.25)
  Top 0.254: v25.1,35.52 28,35.52 v30.6,32.91
  Bottom 0.254: U3.16 26.08,35.52 v25.1,35.52 | D3.A1 v30.59,32.91 v30.6,32.91
MPU_INT  (via drill 0.25)
  Top 0.254: U17.12 9.72,22.87 11.96,20.63 13.87,20.63 v15.1,21.86
  Top 0.305: v17,12.31 17,12.73 17.08,12.82 17.08,13.21 17.01,13.27 17.01,16.34 v17.29,16.61 | v17.55,19.98 17.13,20.4 17.13,22.12 v17.08,22.12
  Bottom 0.305: U1.48 17.55,12.47 17.39,12.31 v17,12.31 | v17.29,16.61 17.69,17.02 17.69,19.91 17.64,19.98 v17.55,19.98 | v17.08,22.12 16.18,23.02 15.81,23.02 15.1,22.3 v15.1,21.86
N$1  (via drill 0.25)
  Top 0.254: J8.3 28.5,5.79 v28.5,5.81
  Bottom 0.254: v28.5,5.81 28.39,5.91 28.39,8.11 27.39,9.11 22,9.11 21.87,9.24 R2.2
N$2
  Top 0.254: R27.2 20.44,8.77 U18.3
N$3
  Bottom 0.254: PB1.6 29.67,17.79 29.48,17.6 R6.1
N$4
  Bottom 0.305: C2.2 15.93,12.18 15.74,12.37 15.26,12.85 14.62,12.85 Y1.2 14.43,13.09 14.5,13.15 15.33,13.15 16.05,13.87 U1.1
N$5
  Top 0.254: U17.10 8.86,25.46 8.6,25.2 C15.1
N$6
  Bottom 0.254: Y1.1 11.93,11.58 C3.2
  Bottom 0.305: Y1.1 11.93,14.14 12.88,15.1 U1.2
N$7
  Top 0.254: U9.3 10.92,1.34 10.79,1.21 R25.2
N$8
  Top 0.305: Q1.5 19.6,24.61 19.87,24.88 R10.2 R11.2
N$9  (via drill 0.25)
  Top 0.305: v25.36,27.45 25.1,27.71 20.29,27.71 20.1,27.52 19.87,27.29 R10.1
  Bottom 0.305: U3.24 26.08,27.52 25.39,27.52 25.36,27.48 v25.36,27.45
N$10
  Bottom 0.254: U1.43 20.05,11.86 20.75,11.16 C9.2
N$11
  Bottom 0.254: U3.8 17.72,33.41 R13.2
N$12  (via drill 0.25)
  Top 0.305: Q1.6 18.95,25.71 R12.2 19,24.55 17.83,24.55 17.39,25 17.39,28.17 14.39,31.17 14.39,31.52 v14.29,31.62 | v12.19,31.12 12.19,32.02 13.79,33.62 23,33.62 24,32.61 v24.87,32.61 RST.X
  Bottom 0.305: v14.29,31.62 14.48,31.43 14.48,30.62 14.18,30.31 12.39,30.31 12.1,30.62 12.1,31.02 v12.19,31.12 | U3.19 26.04,32.61 v24.87,32.61
N$13
  Bottom 0.254: D1.C 12.25,18.91 R26.2
N$14
  Top 0.254: U17.13 10.44,22.96
  Top 0.305: C35.1 10.69,22.71 10.44,22.96
N$15
  Bottom 0.254: U1.9 14.23,18.6 D1.A
N$16
  Bottom 0.254: D3.C1 R17.1
N$17
  Bottom 0.254: D3.C2 R16.1
N$18
  Bottom 0.254: D3.C3 R15.1
N$19  (via drill 0.25)
  Top 0.305: R14.1 18.11,28.33 18.48,28.7 v19.19,28.7
  Top 0.406: v19.19,28.7 19.19,28.21 | 19.19,28.21 19.1,28.12 | JTMS.X 19.19,28.03 19.19,28.21
  Bottom 0.406: U3.31 19.23,28.68 v19.19,28.71 v19.19,28.7
N$20  (via drill 0.25)
  Top 0.305: JTDO.X 20.36,29.63 R19.2 v20.39,28.82 v20.39,28.81
  Bottom 0.305: v20.39,28.81 20.39,28.06 U3.32
N$21  (via drill 0.25)
  Top 0.305: R18.1 16.6,20.85 16.6,22.71 16.12,23.19 | 16.12,23.21 16.12,23.19 | 16.12,23.19 16,23.31 16,27.21 13,30.21 13,31.93 13.88,32.81 18.5,32.81 18.86,32.45 20.37,32.45 20.83,31.99 20.83,31.98 22.6,30.21 22.6,29.12 23,28.71 v24.1,28.71
  Top 0.406: v24.1,28.71 22.77,28.71 JCLK.X
  Bottom 0.406: U3.35 23.63,28.45 23.89,28.71 v24.1,28.71
N$23  (via drill 0.25)
  Top 0.406: v19.29,31.12 19.29,30.62 LPO_IN.X
  Bottom 0.406: U3.5 19.12,30.54 19.29,30.71 v19.29,31.12
N$25
  Top 0.406: R21.1 19.64,14.52 D4.C
N$28
  Top 0.406: U5.1 23.56,9.59 20.03,9.59 17.59,12.02 R21.2 R20.2
N$30
  Top 0.406: U5.5 23.22,12.43 R22.1
N$31
  Top 0.305: U6.3 11.18,5.8 10.8,5.42 C20.2
N$32
  Top 0.305: C20.1 12.5,7.52 12.96,7.98 U6.6
N$33
  Top 0.305: C25.2 7.3,4.42 7.77,4.89 U7.4
N$40
  Top 0.305: 30.05,12.95 29.15,13.85
  Top 0.406: D2.1 26.14,18.86 26.89,19.62 28.52,19.62 J3.6 29.85,20.95 J3.7 J3.8 J3.9 J3.10 30.05,12.95 29.27,13.73 C38.1 29.25,11.24 R28.2 | 29.15,13.85 J3.11
N$42
  Top 0.406: D5.A 18.91,16.65 18.59,16.33 R20.1
PA02_EDA_SIG  (via drill 0.25)
  Top 0.305: v5.5,29.21 5.54,29.27 J1.2
  Bottom 0.305: U1.3 12.58,15.6 11.69,14.71 7.09,14.71 6.5,15.31 6.21,15.6 5.41,16.4 5.41,29.13 v5.5,29.21
PA12_S2_TX_MOSI  (via drill 0.25)
  Top 0.254: v21.55,23.37 21.95,23.77 24.25,23.77 24.79,24.31 v24.79,27.12
  Bottom 0.254: U1.21 v21.55,23.37 | U3.36 24.73,27.18 v24.79,27.12
PA13_S2_RX_MISO
  Bottom 0.254: U1.22 22.05,23.56 20.1,25.52 18.29,25.52 17.86,25.95 U3.1
PA14_S2_RTS_CS  (via drill 0.25)
  Top 0.305: v25,30.52 25.69,30.52 26,30.21 26,24.81 24.1,22.91 v23.6,22.91
  Bottom 0.254: U3.28 21.98,25.57 23.6,23.95 v23.6,22.91 23.6,20.8 23.3,20.5 22.81,20.5 22.56,20.75 U1.23 | U3.21 25.02,30.54 v25,30.52
PA15_S2_CTS_SCK  (via drill 0.25)
  Top 0.305: v25,31.41 25.68,31.41 26.64,30.45 26.64,24.76 24.1,22.21 23.1,22.21 23,22.31 23,22.81 v23.05,22.81
  Bottom 0.254: U3.29 20.98,25.93 23.05,23.86 v23.05,22.81 U1.24 | U3.20 25.98,31.41 v25,31.41
PA16_S1_MOSI  (via drill 0.25)
  Top 0.254: J1.24 10.14,18.27 10.94,17.46
  Top 0.305: 10.94,17.46 20.94,17.46 23.1,19.62 v23.1,19.71 | v6.09,18.21 6.14,18.27 J1.24
  Bottom 0.305: U1.25 23.48,20.1 v23.1,19.71 | MOSI.X 6.2,18.12 v6.09,18.21
PA17_S1_SCK  (via drill 0.25)
  Top 0.305: v8.2,20.25 8.2,20.21 8.14,20.27 J1.20 6.25,20.27 v6.09,20.41
  Bottom 0.305: U1.26 23.75,19.6 23.36,19.21 22.5,19.21 21.21,20.5 16.94,20.5 16.9,20.53 10.78,20.53 10,21.31 8.79,21.31 8.2,20.71 v8.2,20.25 | SCK.X 6.09,20.91 v6.09,20.41
PA18_OTG  (via drill 0.25)
  Top 0.254: J3.4 27.71,17.6 26.89,18.41 v26.89,18.81
  Bottom 0.254: v26.89,18.81 26.61,19.1 U1.27
PA19_S1_MISO  (via drill 0.25)
  Top 0.254: 9.51,19.8 9.64,19.67 14.21,19.67 14.97,18.91 16,18.91
  Top 0.305: 15.69,18.91 16,18.91 19.29,18.91 19.83,19.45 20.56,19.45 v21.29,18.71 | 9.51,19.8 8.54,20.77 J1.19 6.64,20.77 6.09,21.31 v6.09,22.31
  Bottom 0.305: U1.28 21.41,18.6 v21.29,18.71 | v6.09,22.31 6.2,22.41 MISO.X
PA20_CS  (via drill 0.25)
  Top 0.305: v20.79,18.41 20.39,18.81 19.89,18.81 19.5,18.41 14.89,18.41 14.04,19.27 8.6,19.27 8.09,19.77 J1.21 6.45,19.77 6.39,19.71 v6.09,19.71
  Bottom 0.305: U1.29 21.11,18.1 v20.79,18.41 | v6.09,19.71 6.29,19.52 CS.X
PA27_GPIO0  (via drill 0.25)
  Top 0.305: v24.39,20.81 24.38,20.8 24.38,19.72 23.79,19.13 23.48,19.13 22.39,18.05 22.39,15.61 v22,15.21 | GPIO0.X 23.22,25.19 22.98,25.43 v22.98,25.81
  Bottom 0.254: U1.39 22.1,13.15 22.1,13.91 22,14.02 v22,15.21
  Bottom 0.305: U3.27 v22.98,25.81 22.98,25.23 24.39,23.81 v24.39,20.81
PA28_ACK  (via drill 0.25)
  Top 0.254: v21.6,19.21 21.89,19.21 27.19,24.52 27.19,30.81 26.1,31.91 22.89,31.91 21.69,33.12 v19.19,33.12
  Bottom 0.254: U1.41 21.05,16.26 19.6,17.71 19.6,19.71 19.97,20.09 20.72,20.09 v21.6,19.21 | v19.19,33.12 18.62,32.54 U3.7
PA30_SWCLK  (via drill 0.25)
  Top 0.254: J8.4 26.81,4.31 24.6,4.31 v24.5,4.41
  Top 0.305: v19,20.02 18.19,20.81 18.19,22.35 16.9,23.64 16.9,27.91 v14,30.81
  Bottom 0.254: U1.45 19.05,10.86 19.29,10.61 19.29,9.3 19.44,9.15 20.75,9.15 21.29,8.61 22.6,8.61 24.19,7.02 24.19,4.71 v24.5,4.41 | R13.1 12.69,33.39 R4.1
  Bottom 0.305: U1.45 19.05,15.66 19,15.71 v19,20.02 | v14,30.81 12.69,32.12 R4.1
PA31_SWDIO  (via drill 0.25)
  Top 0.254: v24.39,1.01 26.6,1.01 27.5,1.91 27.5,3.73 J8.2
  Top 0.305: v18.29,19.91 17.69,20.52 17.69,22.24 16.47,23.46 16.47,27.44 13.5,30.41 13.5,31.81 13.89,32.21 17.89,32.21 18.1,32.02 20.19,32.02 20.39,31.81 20.39,31.52 20.39,31.51 R19.1
  Bottom 0.254: U1.46 18.55,10.65 18.79,10.41 18.79,9.1 19.24,8.65 20.45,8.65 20.99,8.11 22.39,8.11 23.69,6.81 23.69,1.71 v24.39,1.01
  Bottom 0.305: U1.46 18.55,15.26 18.29,15.52 v18.29,19.91
PB08_RST  (via drill 0.25)
  Top 0.254: Q1.2 R9.2 19.61,19.94 19.1,19.41 17.39,19.41 17.29,19.52 v17.21,19.52
  Bottom 0.254: v17.21,19.52 17.21,17.86 16.95,17.6 U1.7
PB10_DRDY  (via drill 0.25)
  Top 0.305: v9.24,20.75 9.24,20.78 8.76,21.27 J1.18
  Route15 0.406: v9.24,20.75 9.78,20.21 16.5,20.21 18,21.71 19.5,21.71 20.6,22.81 20.6,23.91 v20.79,24.12
  Bottom 0.254: U1.19 20.55,23.87 v20.79,24.12
  Bottom 0.305: 9.19,20.71 9.23,20.75 v9.24,20.75
PB11_CLKSEL  (via drill 0.25)
  Top 0.254: J1.22 6.45,19.27 6.2,19.02 6.2,18.91 v6.09,18.91
  Route15 0.406: v6.09,18.91 19,18.91 21.19,21.12 21.19,22.41 v21.1,22.52
  Bottom 0.254: U1.20 21.05,22.47 v21.1,22.52
PB22_S5_TX  (via drill 0.25)
  Top 0.254: v23,11.41 v23,10.17
  Bottom 0.254: U3.23 26.13,28.52 27,28.52 27.6,27.91 27.6,24.91 28.19,24.31 31.69,24.31 31.69,23.18 31.82,23.06 31.82,11.79 RX.X 30.85,10.82 30.85,10.23 30.54,9.91 23.19,9.91 23.19,9.97 v23,10.17 | U1.37 23.05,11.47 v23,11.41
PB23_S5_RX  (via drill 0.25)
  Top 0.254: v30.19,12.02 31,11.21 v32.67,11.21 32.69,11.21
  Bottom 0.254: v25,29.52 25.02,29.54 U3.22 26.97,29.54 27,29.52 27.1,29.52 28,30.41 31.5,30.41 32.67,29.24 v32.67,11.21 TX.X | U1.38 22.55,13.87 22.89,14.21 23.39,14.21 23.69,13.91 23.69,11.91 24.39,11.21 29.39,11.21 v30.19,12.02
RED  (via drill 0.25)
  Top 0.254: v29.39,32.91 27.79,34.52 v25.1,34.52
  Bottom 0.254: U3.17 26.08,34.52 v25.1,34.52 | D3.A2 29.39,32.12 v29.39,32.91
RESET#  (via drill 0.25)
  Top 0.305: Q1.3 20.25,22.41 20.79,22.95 20.79,23.41 21.89,24.51 23.85,24.51 24.26,24.91 v24.29,24.91
  Bottom 0.305: R5.2 27.88,13.53 27.39,14.02 27.39,19.39 27,19.8 27,22.21 v24.29,24.91
RESETN
  Bottom 0.305: R6.2 C1.1 R3.1 R5.1 30.68,13.33 30.68,11.6 29.73,10.65 R2.1 21.87,11.19 21.89,11.21 21.89,11.41 21.55,11.76 U1.40
S0_I2C_SCL  (via drill 0.25)
  Top 0.254: U17.23 13.68,26.45 14.07,26.45 14.34,26.17 14.34,25.24 14.76,24.81 15,24.81
  Top 0.305: 15,24.81 v15,24.71 | J1.16 v8.34,22.27 8.39,22.31 | R14.2 18,25.71 18,25.17 v18.02,25.14
  Bottom 0.254: U1.14 18.05,22.46 17.68,22.83 17.68,23.31
  Bottom 0.305: v15,24.71 14.57,24.29 U4.6 | R8.1 16.19,23.52 v15,24.71 | 17.68,23.31 R8.1 | v8.34,22.27 8.34,23.77 10.19,25.62 10.19,25.91 10.6,26.31 15.29,26.31 15.6,26.02 15.6,25.31 v15,24.71 | v18.02,25.14 18.07,25.09 18.09,25.09 18.39,24.79 18.39,23.71 18.19,23.52 R8.1
S0_I2C_SDA  (via drill 0.25)
  Top 0.254: U17.24 13.67,27.28 13.83,27.45
  Top 0.305: v15.1,25.53 15.28,25.53 15.49,25.32 | 15.49,25.32 15.49,23.02 v15.99,22.52 15.99,21.71 15,20.72 R18.2 15,20.24 15,20.23 10.68,20.23 9.14,21.77 J1.17 | 13.83,27.45 14.86,27.45 15.49,26.82 15.49,25.32
  Bottom 0.254: U4.5 13.86,25.28 14.19,25.62 15.01,25.62 v15.1,25.53
  Bottom 0.305: U1.13 17.08,21.6 R7.1 16.69,21.71 16,22.41 v16,22.51 v15.99,22.52
USBN  (via drill 0.25)
  Top 0.254: J3.2 27.41,16.3 27.1,16.61 26,16.61 25.89,16.61 | 25.89,16.61 24.86,16.61 24.44,16.19 D2.3 24.34,15.79 23.56,15.79 D-1.X | 25.89,16.61 v25.89,16.54
  Bottom 0.254: v25.89,16.54 25.46,16.1 U1.33
USBP  (via drill 0.25)
  Top 0.254: J3.3 27.3,16.95 27.25,17 26.39,17 | 26.39,17 24.94,17 24.44,17.49 D2.2 23.44,17.99 D+1.X | v26.39,17.07 26.39,17
  Bottom 0.254: U1.34 25.68,15.6 26.39,16.31 v26.39,17.07
V_BATT  (via drill 0.25)
  Top 0.19: C19.2
  Top 0.254: U9.6 14.27,3.27 C7.2 | C19.2 16.87,6.19 17.22,6.54 U18.6 | R23.2 16.15,9.77 15.69,9.31 | C19.2 15.42,6.19 15.1,6.52 15.1,8.71 15.69,9.31 | U18.4 16.25,8.77 15.69,9.31 | U9.4 12.87,1.34 13.1,1.11 v16.19,1.11
  Top 0.406: C7.2 v15.32,3.24 16,3.91 C19.2 15.89,6.19
  Bottom 0.254: v16.19,1.11 16.19,1.71 16.39,1.91
  Bottom 0.406: v15.32,3.24 15.35,3.21 16.1,3.21 16.39,2.91 16.39,2.14 S1.3 16.39,1.91 S1.6
VBAT_LVL  (via drill 0.25)
  Top 0.254: C33.2 15.08,11.1 R24.2 15.2,12.2 R23.1 16.15,12.57 v16.6,13.02
  Bottom 0.254: v16.6,13.02 16.6,13.71 17.19,14.31 17.19,15.91 17.01,16.1 U1.4
VCC  (via drill 0.25)
  Top 0.254: J1.11 J1.12 7.64,24.27 7.89,24.51 7.89,25.41 8.94,26.46 U17.8 8.9,26.46 8.76,26.6 8.76,28.1 C34.1 9.68,28.23 9.69,28.21 v9.79,28.21 | R27.1 v20.5,7.02 20.5,6.61 20.53,6.58 C18.2 19.57,6.54 19.19,6.91 19.19,7.44 U18.1 | J8.1 29.87,3.99 30.19,4.31 32.69,4.31 32.69,8.71 31,10.41 v30.39,10.41 | 18.8,27.12 18.8,27.22 v18.8,27.31 v18.79,27.31
  Top 0.305: 18.8,27.12 19,26.92 R12.1 | 18.8,27.22 18.79,27.21
  Bottom 0.19: 16.89,34.41 v16.89,34.91
  Bottom 0.254: C8.2 19.55,11.01 v19.55,11.41 U1.44 | R4.2 16.07,32.54 16.1,32.52 16.1,31.81 C28.2 C29.1 16.02,29.32 C30.2 C31.1 | C13.2 16.12,35.54 U3.10 | U3.9 17.73,34.41 16.89,34.41 C12.1 | U1.17 19.55,22.56 | 19.1,23.02 19.55,22.56 | C11.2 24.55,13.72 U1.36 | L3.1 6.8,15.81 7,15.61 9,15.61 9.1,15.71 9.15,15.71 v9.19,15.67 | R8.2 16.99,24.52 | 19.55,22.56 v19.55,22.63 | 16.22,26.81 14.69,26.81 14.6,26.72 v14.6,26.8
  Bottom 0.305: U4.8 13.86,22.38 13.85,22.37 | 13.85,22.37 13.79,22.31 13.31,22.31 C53.1 | R7.2 15,21.21 v13.94,22.27 13.85,22.37 | C10.2 19.04,23.07 19.1,23.02 | R3.2 28.49,14.45 27.89,15.04 v27.89,15.11 | C11.2 26.42,13.69 v26.79,13.31 | U3.10 U3.9
  Bottom 0.406: C14.2 17.68,11.02 v16.89,11.02 | C31.1 16.22,26.81 16.22,25.28 16.99,24.52
  pour Route15 (isolate 0.254): 32.69,26.71 28.29,26.71 27.29,27.71 27.29,34.71 27.39,34.81 26.39,35.81 9.1,35.81 9.1,2.91 11.39,0.61 22.29,0.61 23.5,1.81 23.5,8.52 23.6,8.61 23.6,8.81 24.79,10.02 30.69,10.02 32.69,12.02
VDDANA
  Bottom 0.254: U1.6 15.11,17.1 14.93,17.27 C5.2 13.64,17.27 13.39,17.52 10.5,17.52 10.05,17.07 C4.2 10.02,16.62 L3.2

## Text on the board
tNames: FACIA_MAINBOARD_V0.1_3/12/20 | JGND | LPO_IN | RST | JTDO | JTMS | JCLK | GPIO0
bNames: MISO | SCK | CS | MOSI | 5V | GND | TX | AGND | RX | ON